# Altium PCB Project.PcbDoc
Units mm, origin at the board's own origin, x right, y up, seen from the top; angles counter-clockwise.
Board outline 150.24 x 92.08 mm, 2 copper layers (Top Layer, Bottom Layer); 38 components, 73 nets, 275 pads, 64 vias.
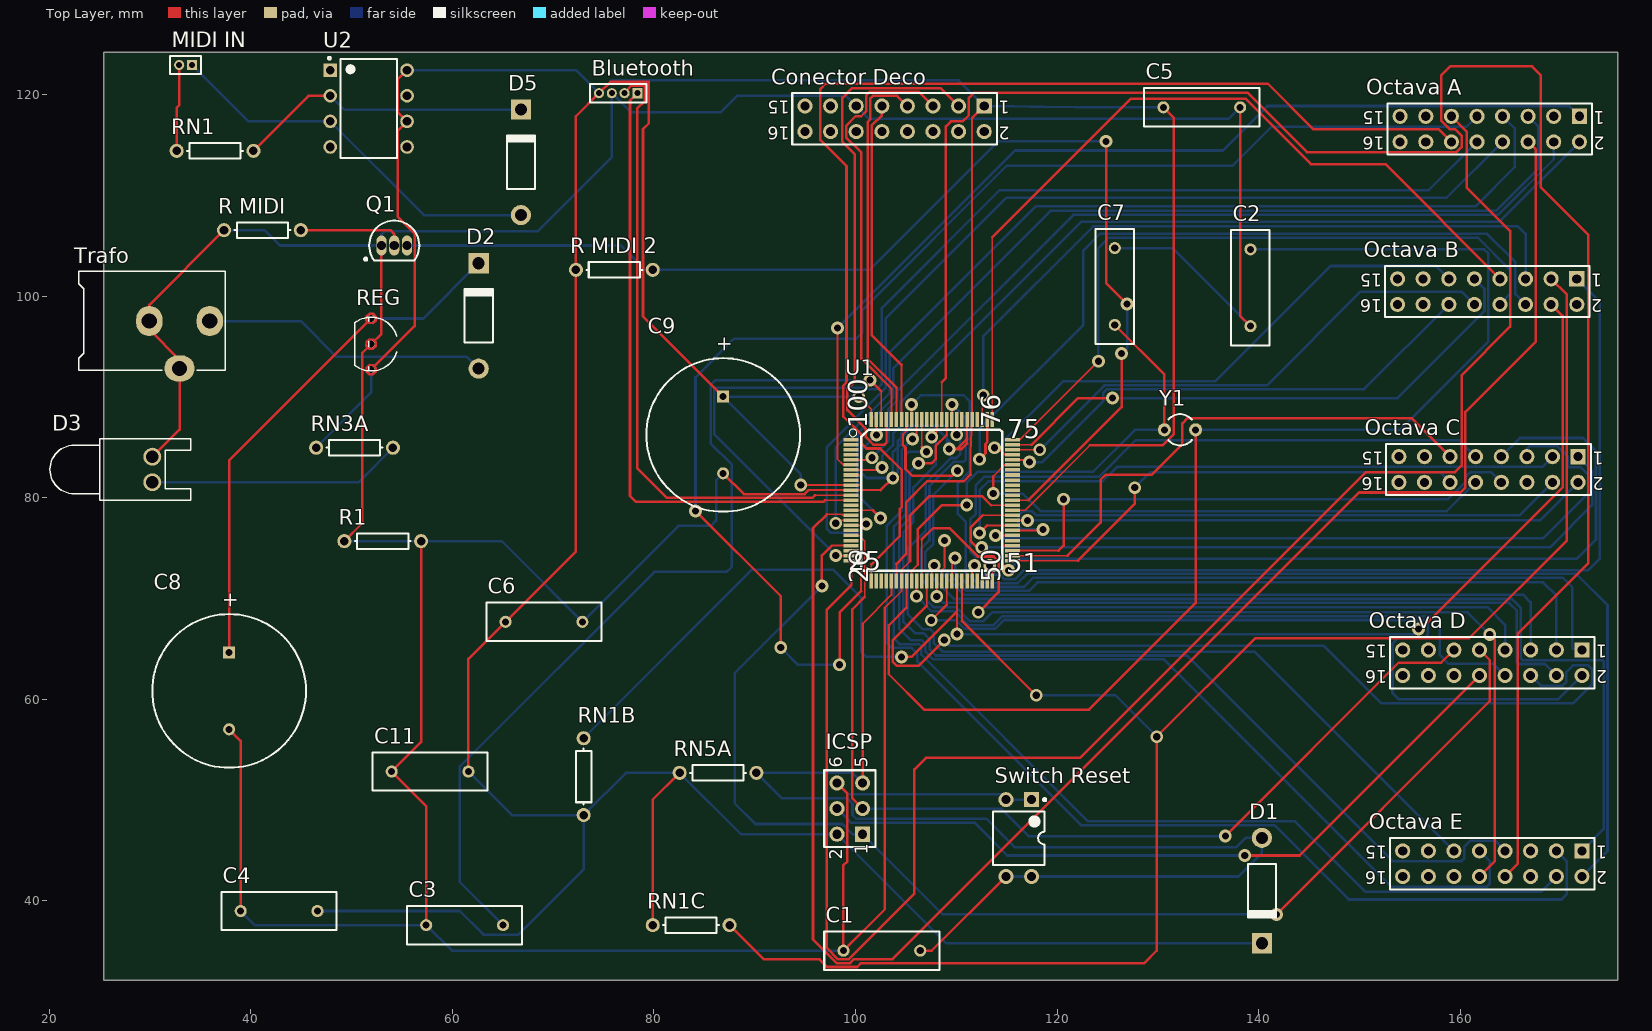
[diagram p0: Top Layer view]
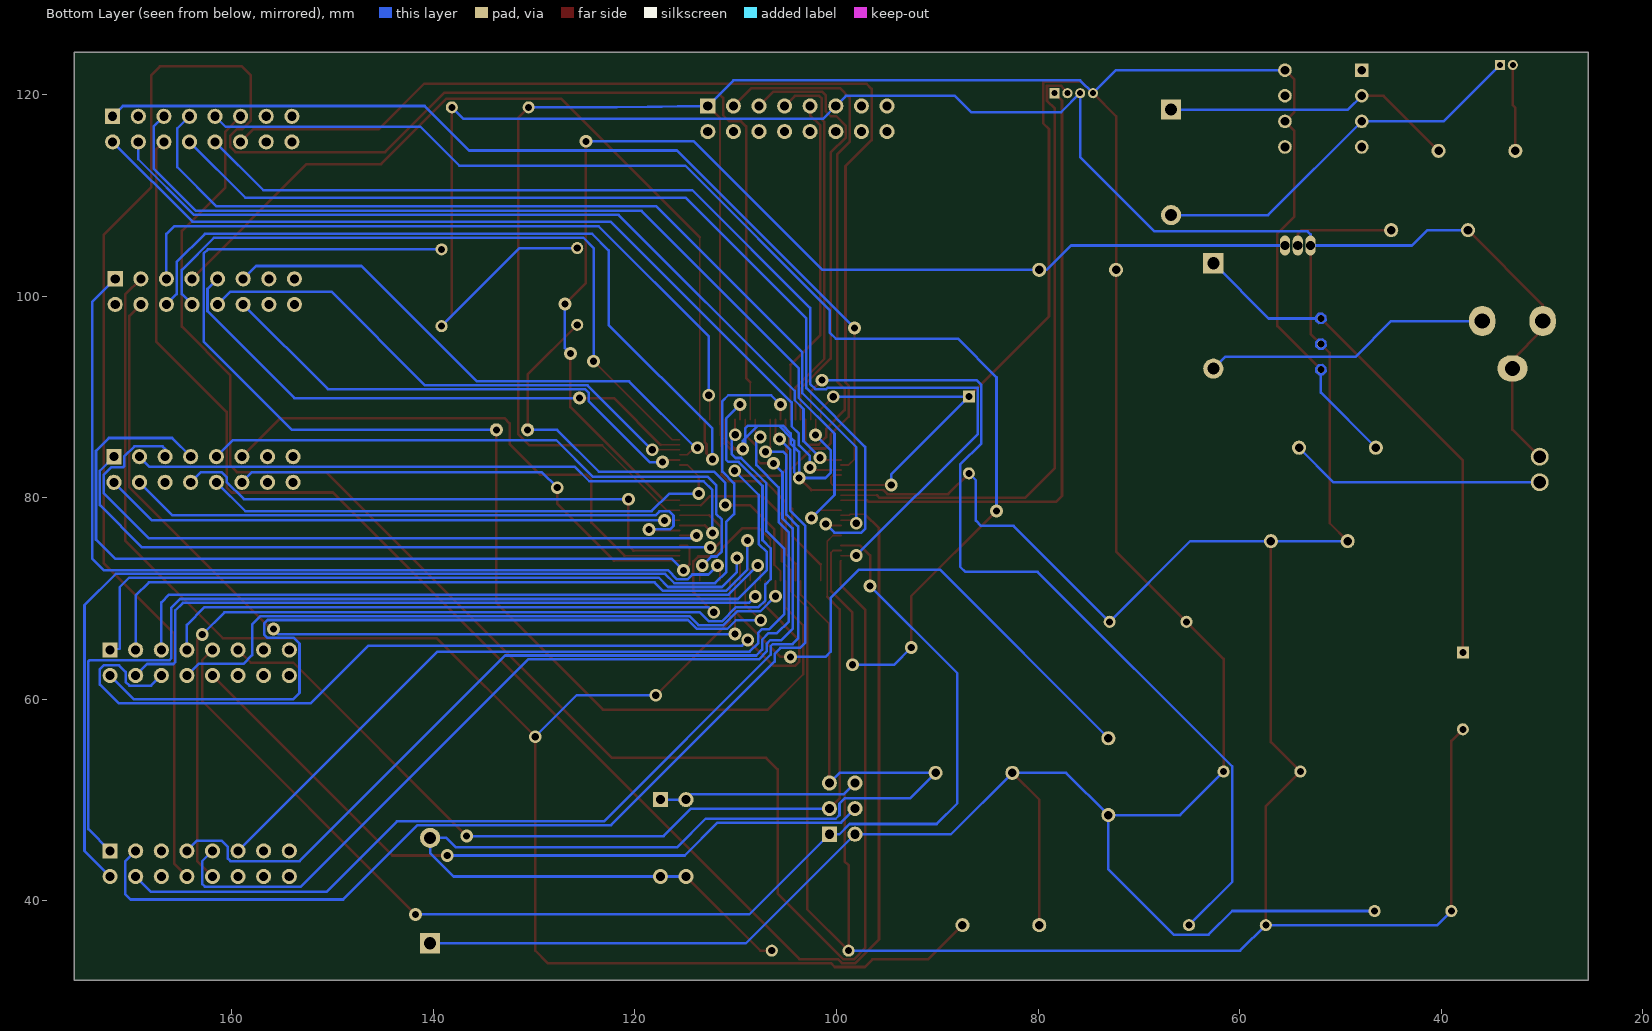
[diagram p1: Bottom Layer view, seen from below]

## Layer stack, top to bottom
Top Solder: solder mask 0.0102, Solder Resist, Dk 3.5
Top Layer: signal copper 0.0356
Dielectric 1: dielectric 0.32, FR-4, Dk 4.8
Bottom Layer: signal copper 0.0356
Bottom Solder: solder mask 0.0102, Solder Resist, Dk 3.5

## Board outline
25.4,32.131 175.641,32.131 175.641,124.206 25.4,124.206

## Design rules (kind name [scope] priority, off if disabled: settings)
Clearance [All] p1: gap=0.127
PolygonConnect [All] p1: connectstyle=Relief reliefconductorwidth=0.254 reliefentries=4 polygonreliefangle="90 Angle" airgapwidth=0.254
RoutingVias [All] p1: holewidth=0.711 width=1.27 viastyle="Through Hole" minholewidth=0.711 minwidth=1.27 maxholewidth=0.711 maxwidth=1.27
SMDNeckDown [All] p1: percent=50.000
SolderMaskExpansion [All] p1: expansion=0.102
Width [All] p1: maxlimit=0.254 minlimit=0.127 preferedwidth=0.254
30 further rules are at their usual default settings.

## Components (designator, comment, footprint, x,y, rotation, side; value= is the part's Value field where it differs from the comment)
Bluetooth "MHDR1X4" MHDR1X4 78.359,120.142 r180 top
C1 "Cap" RAD-0.3 102.616,35.052 r0 top
C2 "Cap" RAD-0.3 139.192,100.838 r270 top
C3 "Cap" RAD-0.3 61.214,37.592 r180 top
C4 "Cap" RAD-0.3 42.799,38.989 r180 top
C5 "Cap" RAD-0.3 134.366,118.745 r0 top
C6 "Cap" RAD-0.3 69.088,67.691 r0 top
C7 "Cap" RAD-0.3 125.73,100.965 r90 top
C8 "Cap Pol1" RB7.6-15 37.846,60.833 r90 top
C9 "Cap Pol1" RB7.6-15 86.868,86.233 r90 top
C11 "Cap" RAD-0.3 57.785,52.832 r0 top
"Conector Deco" "Header 8X2" HDR2X8 112.776,118.872 r180 top
D1 "Diode 1N4001" DO-41 140.335,41.021 r270 top
D2 "Diode 1N4001" DO-41 62.611,98.044 r90 top
D3 "LED_ON" LED-0 30.226,82.804 r270 top
D5 "Diode 1N4148" DO-41 66.802,113.284 r90 top
ICSP "Header 3X2" HDR2X3 100.711,46.609 r90 top
"MIDI IN" "MHDR1X2" MHDR1X2 34.163,122.936 r180 top
"Octava A" "Header 8X2" HDR2X8 171.831,117.856 r180 top
"Octava B" "Header 8X2" HDR2X8 171.577,101.727 r180 top
"Octava C" "Header 8X2" HDR2X8 171.704,84.074 r180 top
"Octava D" "Header 8X2" HDR2X8 172.085,64.897 r180 top
"Octava E" "Header 8X2" HDR2X8 172.085,44.958 r180 top
Q1 "BC547" TO-92A 54.229,105.029 r270 top
R1 "Res1" AXIAL-0.3 53.086,75.692 r180 top
"R MIDI" "Res1" AXIAL-0.3 41.148,106.553 r180 top
"R MIDI 2" "Res1" AXIAL-0.3 76.073,102.616 r0 top
REG "7805" TO92- 51.943,95.25 r270 top
RN1 "Res1" AXIAL-0.3 36.449,114.427 r180 top
RN1B "Res1" AXIAL-0.3 73.025,52.324 r90 top
RN1C "Res1" AXIAL-0.3 83.693,37.592 r0 top
RN3A "Res1" AXIAL-0.3 50.292,84.963 r180 top
RN5A "Res1" AXIAL-0.3 86.36,52.705 r180 top
"Switch Reset" "SW DIP-2" DIP-4 116.205,46.228 r270 top
Trafo "*" CONN_PWR_JACK_2.1x5.5mm 22.225,97.536 r90 top
U1 "MCU-ATMEGA2560-16AU(TQFP100)" TQFP100-0.5-14X14MM 107.569,79.756 r0 top
U2 "6N136" DIP762W50P254L977H451Q8 51.689,118.618 r0 top
Y1 "XTAL" R38 132.207,86.741 r90 top

## Footprints (in the part's own frame and the unit in brackets; to place one, negate y for a bottom-side part, rotate by r counter-clockwise, add the part's x,y. Pads: shape width x height; smd on the part's side, far side on the other; paste and mask are expansions set on the pad)
AXIAL-0.3 [mm] "Axial Device, Thru-Hole; 2 Leads; 0.3 in Pin Spacing"
  round 1.4 hole 0.85: 1(-3.81,0) 2(3.81,0)
  silkscreen extent -2.77,-0.76 2.77,0.76
CONN_PWR_JACK_2.1x5.5mm [mm] "Power Connector, 2.1mm ID, 5.5mm OD"
  oval 3x2.6 hole 1.511: 1(0,-13.7) 2(0,-7.7)
  oval 2.6x3 hole 1.511: 3(-4.7,-10.7)
  silkscreen extent -4.9,-15.23 4.93,-0.7, body extent -4.9,-14.1 4.5,0, height 11
DIP762W50P254L977H451Q8 [mm]
  rect 1.35x1.35 hole 0.85: 1(-3.81,3.81)
  round 1.35 hole 0.85: 2(-3.81,1.27) 3(-3.81,-1.27) 4(-3.81,-3.81) 5(3.81,-3.81) 6(3.81,-1.27) 7(3.81,1.27) 8(3.81,3.81)
  silkscreen extent -4.04,-4.9 2.8,5.14
DIP-4 [mm] "DIP; 4 Leads; Row Spacing 7.62 mm; Pitch 2.54 mm"
  rect 1.5x1.5 hole 0.9: 1(-3.81,1.27)
  round 1.5 hole 0.9: 2(-3.81,-1.27) 3(3.81,-1.27) 4(3.81,1.27)
  silkscreen extent -3.93,-2.55 2.65,2.7, body extent -3.15,-2.5 3.15,2.5, height 5.6
DO-41 [mm] "Diode, Axial; Body 5.2 x 2.7 mm (LxDia. max), Lead Dia. 0.86 mm (max)"
  round 2 hole 1.2: 1(-5.23,0)
  rect 2x2 hole 1.2: 2(5.23,0)
  silkscreen extent -2.65,-1.4 2.75,1.4
HDR2X3 [mm] "Connector; Header; 3x2 Position"
  rect 1.5x1.5 hole 0.9: 1(0,0)
  round 1.5 hole 0.9: 2(0,2.54) 3(2.54,0) 4(2.54,2.54) 5(5.08,0) 6(5.08,2.54)
  silkscreen extent -1.27,-1.27 6.35,3.81
HDR2X8 [mm] "Connector; Header; 8x2 Position"
  rect 1.5x1.5 hole 0.9: 1(0,0)
  round 1.5 hole 0.9: 2(0,2.54) 3(2.54,0) 4(2.54,2.54) 5(5.08,0) 6(5.08,2.54) 7(7.62,0) 8(7.62,2.54) 9(10.16,0) 10(10.16,2.54) 11(12.7,0) 12(12.7,2.54) 13(15.24,0) 14(15.24,2.54) 15(17.78,0) 16(17.78,2.54)
  silkscreen extent -1.27,-1.27 19.05,3.81
LED-0 [mil] "LED; 2 Leads"
  round 70 hole 50: 1(50,0) 2(-50,0)
  silkscreen extent -120,-400 120,150
MHDR1X2 [mm] "Connector; Header; 2 Position"
  rect 1x1 hole 0.6: 1(0,0)
  round 1 hole 0.6: 2(1.27,0)
  silkscreen extent -0.9,-0.9 2.17,0.9
MHDR1X4 [mm] "Connector; Header; 4 Position"
  rect 1x1 hole 0.6: 1(0,0)
  round 1 hole 0.6: 2(1.27,0) 3(2.54,0) 4(3.81,0)
  silkscreen extent -0.9,-0.9 4.71,0.9
R38 [mm] "Crystal, Thru-Hole; 2 Leads; Body 3.1 x 8.2 mm (Dia.xH)"
  round 1.3 hole 0.7: 1(0,1.55) 2(0,-1.55)
  silkscreen extent -1.55,-1.19 1.55,1.17
RAD-0.3 [mm] "Radial Cap, Thru-Hole; 2 Leads; 0.3 in Pin Spacing"
  round 1.2 hole 0.7: 1(-3.81,0) 2(3.81,0)
  silkscreen extent -5.71,-1.91 5.71,1.91
RB7.6-15 [mm] "Polarized Capacitor (Radial); 2 Leads"
  rect 1.2x1.2 hole 0.7: 1(3.81,0)
  round 1.2 hole 0.7: 2(-3.81,0)
  silkscreen extent -7.62,-7.62 7.62,7.62
TO92- [mm]
  round 0.7 hole 0.7: 1(-2.54,0) 2(0,0) 3(2.54,0)
  Top Layer region: 3.108,0.207 2.795,0.547 2.333,0.568 1.993,0.255 1.972,-0.207 2.285,-0.547 2.747,-0.568 3.087,-0.255
  Top Layer region: 0.568,0.207 0.255,0.547 -0.207,0.568 -0.547,0.255 -0.568,-0.207 -0.255,-0.547 0.207,-0.568 0.547,-0.255
  Top Layer region: -1.972,0.207 -2.285,0.547 -2.747,0.568 -3.087,0.255 -3.108,-0.207 -2.795,-0.547 -2.333,-0.568 -1.993,-0.255
  Bottom Layer region: 3.108,0.207 2.795,0.547 2.333,0.568 1.993,0.255 1.972,-0.207 2.285,-0.547 2.747,-0.568 3.087,-0.255
  Bottom Layer region: 0.568,0.207 0.255,0.547 -0.207,0.568 -0.547,0.255 -0.568,-0.207 -0.255,-0.547 0.207,-0.568 0.547,-0.255
  Bottom Layer region: -1.972,0.207 -2.285,0.547 -2.747,0.568 -3.087,0.255 -3.108,-0.207 -2.795,-0.547 -2.333,-0.568 -1.993,-0.255
  Multi-Layer region: 3.108,0.207 2.795,0.547 2.333,0.568 1.993,0.255 1.972,-0.207 2.285,-0.547 2.747,-0.568 3.087,-0.255
  Multi-Layer region: 0.568,0.207 0.255,0.547 -0.207,0.568 -0.547,0.255 -0.568,-0.207 -0.255,-0.547 0.207,-0.568 0.547,-0.255
  Multi-Layer region: -1.972,0.207 -2.285,0.547 -2.747,0.568 -3.087,0.255 -3.108,-0.207 -2.795,-0.547 -2.333,-0.568 -1.993,-0.255
  silkscreen extent -2.66,-1.65 2.66,2.55
TO-92A [mm] "TO, Flat Index; 3 In-Line, Axial Leads; Body Dia. 4.5mm; Leads 0.51 x 0.48 mm (max)"
  oval 2x1 hole 0.9: 1(0,-1.27) 2(0,0) 3(0,1.27)
  silkscreen extent -2.48,-2.95 1.5,2.48, body extent -2.48,-2.5 1.5,2.5, height 6.86
TQFP100-0.5-14X14MM [mm]
  rect 1.5x0.35 smd: 1(-8,6) 2(-8,5.5) 3(-8,5) 4(-8,4.5) 5(-8,4) 6(-8,3.5) 7(-8,3) 8(-8,2.5) 9(-8,2) 10(-8,1.5) 11(-8,1) 12(-8,0.5) 13(-8,0) 14(-8,-0.5) 15(-8,-1) 16(-8,-1.5) 17(-8,-2) 18(-8,-2.5) 19(-8,-3) 20(-8,-3.5) 21(-8,-4) 22(-8,-4.5) 23(-8,-5) 24(-8,-5.5) 25(-8,-6) 51(8,-6) 52(8,-5.5) 53(8,-5) 54(8,-4.5) 55(8,-4) 56(8,-3.5) 57(8,-3) 58(8,-2.5) 59(8,-2) 60(8,-1.5) 61(8,-1) 62(8,-0.5) 63(8,0) 64(8,0.5) 65(8,1) 66(8,1.5) 67(8,2) 68(8,2.5) 69(8,3) 70(8,3.5) 71(8,4) 72(8,4.5) 73(8,5) 74(8,5.5) 75(8,6)
  rect 0.35x1.5 smd: 26(-6,-8) 27(-5.5,-8) 28(-5,-8) 29(-4.5,-8) 30(-4,-8) 31(-3.5,-8) 32(-3,-8) 33(-2.5,-8) 34(-2,-8) 35(-1.5,-8) 36(-1,-8) 37(-0.5,-8) 38(0,-8) 39(0.5,-8) 40(1,-8) 41(1.5,-8) 42(2,-8) 43(2.5,-8) 44(3,-8) 45(3.5,-8) 46(4,-8) 47(4.5,-8) 48(5,-8) 49(5.5,-8) 50(6,-8) 76(6,8) 77(5.5,8) 78(5,8) 79(4.5,8) 80(4,8) 81(3.5,8) 82(3,8) 83(2.5,8) 84(2,8) 85(1.5,8) 86(1,8) 87(0.5,8) 88(0,8) 89(-0.5,8) 90(-1,8) 91(-1.5,8) 92(-2,8) 93(-2.5,8) 94(-3,8) 95(-3.5,8) 96(-4,8) 97(-4.5,8) 98(-5,8) 99(-5.5,8) 100(-6,8)
  silkscreen extent -8.2,-7 7,7.07

## Part data
Bluetooth: "Header, 4-Pin"
C1 C2 C3 C4 C5 C6 C7 C11: "Capacitor"
C8 C9: "Polarized Capacitor (Radial)"
"Conector Deco" "Octava A" "Octava B" "Octava C" "Octava D" "Octava E": "Header, 8-Pin, Dual row"
D1 D2: "1 Amp General Purpose Rectifier"
D3: library part LED0, "Typical INFRARED GaAs LED"
D5: library part "Diode 1N4001", "1 Amp General Purpose Rectifier"
ICSP: "Header, 3-Pin, Dual row"
"MIDI IN": "Header, 2-Pin"
Q1: library part 2N3904, "NPN General Purpose Amplifier"
R1 "R MIDI" "R MIDI 2" RN1 RN1B RN1C RN3A RN5A: "Resistor"
REG: "5V Positive IC TO-220 Voltage Reg IC TO-220 VOLTAGE REG 5V POSITIVE"
"Switch Reset": "DIP Switch, 2 Position, SPST"
Trafo: library part CONN_PWR_JACK_2.1x5.5mm, "Power Connector, THT, 2.1mm ID, 5.5mm OD"
U1: "ATmega Series 16 MHz 256 KB Flash 8 KB SRAM 8-Bit Microcontroller - TQFP-100"
U2: "6N136 Series Single Channel 15 V 5300 Vrms Transistor Optocoupler - DIP-8"
Y1: "Crystal Oscillator"

## Via types
v1: diameter 1.27, hole 0.711, Top Layer to Bottom Layer, 64 vias

## Nets (pads, with @x,y where several pads share a name; then routed paths per layer and width w, separated by ;. In a path a pad name is that pad's centre, name@x,y a point inside that pad or via, vN(x,y) a via of type N, cw(c..) or ccw(c..) an arc to the next point about the centre after c; other vN are vias at no path point)
GND: "Conector Deco.11" "R MIDI.2" "Switch Reset.1" "Switch Reset.2" Bluetooth.3 C1.1 C2.2 C3.2 C4.2 C5.2 C6.2 C7.2 C8.2 C9.2 C11.1 D3.2 ICSP.6 Q1.1 R1.1 R1.2 REG.2 Trafo.2 Trafo.3 U1.11 U1.32 U1.62 U1.81 U1.99 | length 531.2
  Top Layer w0.175: 95.352,80.756 U1.11 102.498,80.756 ; v1@102.069,86.247 U1.99 ; 102.921,69.091 104.569,70.739 U1.32 104.569,72.87 105.41,73.711 ; 111.069,85.369 111.069,85.852 U1.81 ; 113.454,79.256 U1.62
  Top Layer w0.254: D3.2 32.925,86.773 Trafo.3 32.925,93.675 29.925,96.675 Trafo.2 29.925,99.14 37.338,106.553 ; C8.2 38.989,55.88 C4.2 ; R1.2 51.054,77.47 51.054,94.361 REG.2 52.959,96.266 Q1.1 ; R1.1 56.896,55.753 C11.1 57.404,49.403 C3.2 ; C9.2 88.924,80.367 94.963,80.367 95.352,80.756 ; ICSP.6 99.187,50.673 99.187,43.917 98.806,43.536 C1.1 102.921,39.167 102.921,69.091 ; v1@102.069,86.247 v1(102.083,86.233) ; 102.498,80.756 v1(103.708,81.966) ; 105.41,73.711 105.41,78.232 107.345,80.167 112.543,80.167 113.454,79.256 ; v1(109.296,84.836) 110.053,84.836 ; 111.069,85.369 110.536,84.836 110.053,84.836 ; 111.069,85.852 110.053,84.836 ; C5.2 138.176,98.044 C2.2
  Bottom Layer w0.254: 37.338,106.553 41.377,106.553 42.901,105.029 Q1.1 52.959,106.121 53.264,106.426 68.428,106.426 75.819,113.817 Bluetooth.3 77.699,118.262 86.639,118.262 88.265,119.888 99.06,119.888 100.076,118.872 101.346,117.602 137.033,117.602 C5.2 ; C4.2 40.386,37.592 C3.2 59.944,35.052 C1.1 ; R1.2 R1.1 64.897,75.692 C6.2 82.423,77.216 85.674,77.216 86.182,77.724 86.182,81.737 C9.2 ; ICSP.6 99.289,50.571 114.402,50.571 114.935,50.038 117.475,50.038 ; v1(102.083,86.233) 100.584,84.734 100.584,82.469 101.092,81.961 103.632,81.961 v1@103.708,82.038 ; v1(103.708,81.966) v1@103.708,82.038 ; C7.2 131.445,104.775 C2.2 ; v1@103.708,82.038 104.202,82.532 104.202,85.033 ; v1@103.708,82.038 103.708,84.539 104.202,85.033 ; 104.202,85.033 104.564,85.395 104.564,85.998 ; 104.202,85.033 104.202,85.636 104.564,85.998 ; 104.564,85.998 105.713,87.147 ; 104.564,85.998 104.564,86.392 105.32,87.147 105.713,87.147 ; 105.713,87.147 107.798,87.147 ; 107.798,87.147 109.068,85.877 ; 107.798,87.147 108.788,87.147 109.068,86.868 109.068,85.877 ; 109.068,85.877 109.296,85.649 v1(109.296,84.836) 109.068,85.065 109.068,85.877
NetBluetooth_1: Bluetooth.1 U1.13 | length 62.5
  Top Layer w0.175: 96.977,79.756 U1.13
  Top Layer w0.254: Bluetooth.1 77.626,119.409 77.626,80.195 78.232,79.589 96.81,79.589 96.977,79.756
NetBluetooth_2: Bluetooth.2 U1.12 | length 63.2
  Top Layer w0.175: 96.004,80.256 U1.12
  Top Layer w0.254: Bluetooth.2 77.724,120.896 79.113,120.896 79.113,119.388 78.334,118.609 78.334,82.931 81.28,79.985 95.733,79.985 96.004,80.256
NetC1_2: "Switch Reset.3" "Switch Reset.4" C1.2 D1.1 ICSP.5 RN5A.1 U1.30 | length 125.9
  Top Layer w0.175: 100.711,67.5 103.569,70.358 U1.30
  Top Layer w0.254: ICSP.5 100.711,67.5 ; C1.2 107.569,35.052 114.935,42.418
  Bottom Layer w0.254: ICSP.5 99.695,52.705 RN5A.1 92.71,50.165 99.187,50.165 99.707,49.645 99.707,48.514 100.076,48.145 112.993,48.145 115.799,45.339 137.795,45.339 138.707,46.251 D1.1 140.335,44.742 138.011,42.418 117.475,42.418 114.935,42.418
NetC2_1: C2.1 U1.33 Y1.2 | length 128.7
  Top Layer w0.175: 105.069,69.103 U1.33
  Top Layer w0.254: 105.069,69.103 103.302,67.335 103.302,62.484 106.807,58.979 123.19,58.979 133.757,69.546 Y1.2
  Bottom Layer w0.254: Y1.2 154.039,86.741 162.802,95.504 162.802,104.228 162.382,104.648 C2.1
NetC3_1: C3.1 U1.98 | length 92
  Top Layer w0.175: U1.98 102.569,90.547
  Top Layer w0.254: v1(101.448,91.669) 102.569,90.547
  Bottom Layer w0.254: C3.1 60.731,41.885 60.731,53.34 80.035,72.644 87.224,72.644 87.732,73.152 87.732,83.287 85.623,85.395 85.623,91.186 86.106,91.669 v1(101.448,91.669)
NetC7_1: C7.1 U1.34 Y1.1 | length 47.7
  Top Layer w0.175: U1.34 105.569,72.746 106.172,73.349
  Top Layer w0.254: 106.172,73.349 106.172,76.86 108.585,79.273 v1(111.049,79.273) ; C7.1 130.657,92.228 Y1.1
  Bottom Layer w0.254: v1(111.049,79.273) 111.049,81.495 112.155,82.601 123.596,82.601 127.737,86.741 Y1.1
NetC8_1: C8.1 D2.2 REG.1 | length 51.9
  Top Layer w0.254: C8.1 37.846,83.693 REG.1
  Bottom Layer w0.254: REG.1 57.127,97.79 D2.2
"NetConector Deco_3": "Conector Deco.3" U1.97 | length 52.7
  Top Layer w0.175: 103.069,85.471 U1.97
  Top Layer w0.254: 103.069,85.471 102.878,85.28 101.766,85.28 101.039,86.007 101.039,86.836 99.187,88.688 99.187,90.78 99.949,91.542 99.949,114.058 98.691,115.316 98.691,119.671 99.67,120.65 108.458,120.65 110.236,118.872
"NetConector Deco_5": "Conector Deco.5" U1.96 | length 42.5
  Top Layer w0.175: U1.96 103.569,90.817
  Top Layer w0.254: 103.569,90.817 100.584,93.802 100.584,114.249 99.072,115.761 99.072,116.903 100.025,117.856 100.572,117.856 101.08,118.364 101.08,119.952 101.397,120.269 106.299,120.269 107.696,118.872
"NetConector Deco_7": "Conector Deco.7" U1.95 | length 37.4
  Top Layer w0.175: U1.95 104.069,90.928
  Top Layer w0.254: 104.069,90.928 101.219,93.778 101.219,117.301 101.461,117.543 101.461,119.622 101.727,119.888 104.14,119.888 105.156,118.872
"NetConector Deco_9": "Conector Deco.9" U1.94 | length 32.8
  Top Layer w0.175: U1.94 104.569,93.19
  Top Layer w0.254: 102.616,118.872 102.616,117.936 101.6,116.92 101.6,96.159 104.569,93.19
NetD2_1: D2.1 Trafo.1 | length 28.6
  Bottom Layer w0.254: Trafo.1 44.958,97.536 48.514,93.98 61.445,93.98 D2.1
NetD3_1: D3.1 RN3A.1 | length 25.3
  Bottom Layer w0.254: D3.1 50.673,81.534 RN3A.1
NetD5_1: "MIDI IN.1" D5.1 U2.3 | length 38.8
  Bottom Layer w0.254: 34.163,122.936 39.751,117.348 U2.3 57.173,108.054 D5.1
NetD5_2: D5.2 RN1.1 U2.2 | length 29.4
  Top Layer w0.254: RN1.1 45.72,119.888 U2.2
  Bottom Layer w0.254: U2.2 49.253,118.514 D5.2
NetICSP_1: "Octava D.9" ICSP.1 U1.22 | length 125.2
  Top Layer w0.175: 97.66,75.256 U1.22
  Top Layer w0.254: v1(96.672,71.247) 96.672,74.268 97.66,75.256 ; v1(141.783,38.659) 162.941,59.817 162.941,63.881 161.925,64.897
  Bottom Layer w0.254: v1(96.672,71.247) 88.011,62.586 88.011,49.682 90.068,47.625 98.703,47.625 99.719,46.609 ICSP.1 108.661,38.659 v1(141.783,38.659)
NetICSP_3: "Octava D.11" ICSP.3 U1.20 | length 96.5
  Top Layer w0.175: U1.20 100.35,76.256 100.914,75.692 100.914,70.155
  Top Layer w0.254: ICSP.3 99.695,50.165 99.695,68.936 100.914,70.155 ; v1(136.703,46.431) 153.899,63.627 158.115,63.627 159.385,64.897
  Bottom Layer w0.254: ICSP.3 114.452,49.149 117.17,46.431 v1(136.703,46.431)
NetICSP_4: "Octava D.10" ICSP.4 | length 73.1
  Top Layer w0.254: v1(138.633,44.501) 144.069,44.501 161.925,62.357
  Bottom Layer w0.254: ICSP.4 99.556,47.764 111.799,47.764 115.062,44.501 v1(138.633,44.501)
"NetMIDI IN_2": "MIDI IN.2" RN1.2 | length 8.6
  Top Layer w0.254: RN1.2 32.639,118.694 32.893,118.948 32.893,122.936
"NetOctava A_1": "Octava A.1" U1.6 | length 97.8
  Top Layer w0.175: v1(98.222,96.85) 98.222,83.82 98.786,83.256 U1.6
  Bottom Layer w0.254: v1(98.222,96.85) 115.828,114.456 136.452,114.456 140.868,118.872 170.815,118.872 171.831,117.856
"NetOctava A_2": "Octava A.2" U1.7 | length 88.5
  Top Layer w0.175: U1.7 v1@102.387,82.756
  Top Layer w0.254: v1@102.387,82.756 v1(102.641,83.01)
  Bottom Layer w0.254: v1(102.641,83.01) 102.641,84.137 103.736,85.232 103.736,86.372 104.461,87.097 104.461,89.449 122.421,107.41 163.925,107.41 171.831,115.316
"NetOctava A_4": "Octava A.4" U1.5 | length 86.2
  Top Layer w0.175: U1.5 v1@101.409,83.756
  Top Layer w0.254: v1@101.409,83.756 v1(101.625,83.972)
  Bottom Layer w0.254: v1(101.625,83.972) 103.277,85.624 103.277,88.804 104.146,89.673 104.146,90.6 121.623,108.077 163.779,108.077 169.291,113.589 169.291,115.316
"NetOctava A_5": "Octava A.5" U1.15 | length 98.3
  Top Layer w0.175: U1.15 101.736,78.756
  Top Layer w0.254: 101.736,78.756 v1(102.489,78.003)
  Bottom Layer w0.254: v1(102.489,78.003) 100.203,80.289 100.203,86.36 103.765,89.922 103.765,92.869 119.355,108.458 163.547,108.458 167.767,112.678 167.767,116.84 166.751,117.856
"NetOctava A_6": "Octava A.6" U1.16 | length 168
  Top Layer w0.175: 97.155,78.359 98.654,78.359 98.757,78.256 U1.16
  Top Layer w0.254: 97.155,78.359 95.783,76.987 95.783,36.164 98.131,33.817 99.476,33.817 99.873,34.214 103.683,34.214 149.987,80.518 160.02,80.518 160.528,81.026 160.528,88.519 167.513,95.504 167.513,114.554 166.751,115.316
"NetOctava A_7": "Octava A.7" U1.17 | length 96
  Top Layer w0.175: v1(98.044,77.47) 98.33,77.756 U1.17
  Bottom Layer w0.254: v1(98.044,77.47) 98.044,85.031 103.384,90.371 103.384,94.428 117.875,108.919 161.522,108.919 165.42,112.817 165.42,116.647 164.211,117.856
"NetOctava A_8": "Octava A.8" U1.18 | length 97.8
  Top Layer w0.175: U1.18 100.929,77.256 v1(101.067,77.394)
  Bottom Layer w0.254: v1(101.067,77.394) 100.203,76.53 97.536,76.53 97.155,76.911 97.155,85.039 102.997,90.881 102.997,97.79 114.986,109.779 158.674,109.779 164.211,115.316
"NetOctava A_9": "Octava A.9" U1.23 | length 139.5
  Top Layer w0.175: U1.23 100.352,74.756 100.559,74.549 100.559,70.739
  Top Layer w0.254: v1(84.125,78.689) 92.583,70.231 v1(92.583,65.151) ; v1(98.425,63.424) 98.425,68.605 100.559,70.739
  Bottom Layer w0.254: v1(84.125,78.689) 84.125,91.948 87.96,95.783 100.076,95.783 100.66,96.368 100.66,98.603 115.011,112.954 137.439,112.954 141.3,116.815 160.63,116.815 161.671,117.856 ; v1(92.583,65.151) 94.31,63.424 v1(98.425,63.424)
"NetOctava A_10": "Octava A.10" U1.24 | length 113.5
  Top Layer w0.175: v1(98.046,74.256) U1.24
  Bottom Layer w0.254: v1(98.046,74.256) 86.004,86.297 86.004,90.907 100.884,90.907 101.021,90.77 102.108,90.77 102.616,91.278 102.616,98.831 114.3,110.515 156.87,110.515 161.671,115.316
"NetOctava A_11": "Octava A.11" U1.25 | length 169.5
  Top Layer w0.175: U1.25 99.593,73.756 99.593,71.345
  Top Layer w0.254: 99.593,71.345 97.155,68.906 97.155,35.331 98.288,34.198 99.314,34.198 105.842,40.726 105.842,53.035 106.985,54.178 122.301,54.178 150.673,82.55 159.512,82.55 160.147,83.185 160.147,92.151 164.973,96.977 164.973,106.477 160.655,110.795 160.655,116.332 159.131,117.856
"NetOctava A_12": "Octava A.12" U1.26 | length 119.7
  Top Layer w0.175: U1.26 101.569,73.381
  Top Layer w0.254: 101.569,73.381 104.394,76.206 104.394,78.892 104.597,79.096 104.597,82.728 102.438,84.887 101.092,84.887 100.584,85.395 100.584,86.258 98.806,88.036 98.806,91.135 99.111,91.44 99.111,112.903 96.52,115.494 96.52,120.574 97.028,121.082 140.919,121.082 145.415,116.586 157.861,116.586 159.131,115.316
"NetOctava B_1": "Octava B.1" U1.46 | length 93.8
  Top Layer w0.175: U1.46 111.569,73.025 v1(111.823,73.279)
  Bottom Layer w0.254: v1(111.823,73.279) 112.718,72.384 114.3,72.384 114.777,71.907 115.824,71.907 116.738,72.822 172.72,72.822 173.863,73.965 173.863,99.441 171.577,101.727
"NetOctava B_3": "Octava B.3" RN1C.2 U1.44 | length 169.4
  Top Layer w0.175: 110.569,67.764 U1.44
  Top Layer w0.254: RN1C.2 90.907,34.188 96.438,34.188 97.19,33.436 100.176,33.436 100.557,33.817 128.661,33.817 129.896,35.052 v1(129.896,56.286) 139.675,66.065 160.909,66.065 170.561,75.717 170.561,100.203 169.037,101.727 ; 110.569,67.764 v1(117.932,60.401)
  Bottom Layer w0.254: v1(117.932,60.401) 125.781,60.401 v1(129.896,56.286)
"NetOctava B_4": "Octava B.4" RN1B.2 U1.43 | length 142.6
  Top Layer w0.175: v1@110.069,66.486 110.069,68.7 U1.43
  Top Layer w0.254: v1(104.572,64.211) 105.58,64.211 110.069,68.7 ; v1@110.069,66.486 v1(110.084,66.472) ; v1(155.88,66.98) 156.134,66.98 170.18,81.026 170.18,98.044 169.037,99.187
  Bottom Layer w0.254: RN1B.2 89.75,72.859 97.778,72.859 100.584,70.053 100.584,64.719 101.092,64.211 v1(104.572,64.211) ; v1(110.084,66.472) 155.372,66.472 v1(155.88,66.98)
"NetOctava B_5": "Octava B.5" U1.78 | length 71.4
  Top Layer w0.175: U1.78 v1@112.569,90.065
  Top Layer w0.254: v1@112.569,90.065 v1(112.674,90.17)
  Bottom Layer w0.254: v1(112.674,90.17) 112.674,96.012 123.596,106.934 165.735,106.934 166.497,106.172 166.497,101.727
"NetOctava B_6": "Octava B.6" U1.77 | length 78.6
  Top Layer w0.254: v1(112.319,83.82) 112.903,84.404 112.903,85.331 113.069,85.497 U1.77
  Bottom Layer w0.254: v1(112.319,83.82) 112.319,86.868 122.606,97.155 122.606,104.546 124.239,106.18 162.679,106.18 165.481,103.378 165.481,100.203 166.497,99.187
"NetOctava B_7": "Octava B.7" U1.76 | length 81.6
  Top Layer w0.175: U1.76 113.569,105.847
  Top Layer w0.254: 113.569,105.847 127.33,119.609 138.684,119.609 145.186,113.106 152.578,113.106 163.957,101.727
"NetOctava B_8": "Octava B.8" U1.75 | length 69.5
  Top Layer w0.175: U1.75 116.312,85.756 v1(124.104,93.548)
  Bottom Layer w0.254: v1(124.104,93.548) 124.104,104.775 125.128,105.799 161.79,105.799 164.973,102.616 164.973,100.203 163.957,99.187
"NetOctava B_9": "Octava B.9" U1.74 | length 56
  Top Layer w0.175: U1.74 117.45,85.256
  Top Layer w0.254: 117.45,85.256 122.084,89.891 v1(125.501,89.891)
  Bottom Layer w0.254: v1(125.501,89.891) 153.797,89.891 162.421,98.515 162.421,100.723 161.417,101.727
"NetOctava B_10": "Octava B.10" U1.73 | length 52.9
  Top Layer w0.175: U1.73 v1(118.292,84.756)
  Bottom Layer w0.254: v1(118.292,84.756) 124.696,91.161 140.818,91.161 150.114,100.457 160.147,100.457 161.417,99.187
"NetOctava B_11": "Octava B.11" U1.72 | length 55.2
  Top Layer w0.175: v1(113.792,84.963) 114.097,84.963 114.804,84.256 U1.72
  Bottom Layer w0.254: v1(113.792,84.963) 113.995,84.963 120.574,91.542 135.687,91.542 147.142,102.997 157.607,102.997 158.877,101.727
"NetOctava B_12": "Octava B.12" U1.71 | length 50.4
  Top Layer w0.175: U1.71 117.056,83.756 v1(117.272,83.541)
  Bottom Layer w0.254: v1(117.272,83.541) 118.542,83.541 124.601,89.6 124.601,90.424 124.957,90.78 150.47,90.78 158.877,99.187
"NetOctava C_1": "Octava C.1" U1.60 | length 75.1
  Top Layer w0.175: 112.622,78.256 U1.60
  Top Layer w0.254: v1(112.522,75.057) 112.065,75.057 111.43,75.692 111.43,77.064 112.622,78.256
  Bottom Layer w0.254: v1(112.522,75.057) 112.547,75.082 168.91,75.082 173.101,79.273 173.101,82.677 171.704,84.074
"NetOctava C_2": "Octava C.2" U1.59 | length 57.7
  Top Layer w0.175: U1.59 v1(117.069,77.756)
  Bottom Layer w0.254: v1(117.069,77.756) 167.926,77.756 171.704,81.534
"NetOctava C_3": "Octava C.3" U1.58 | length 66
  Top Layer w0.175: 113.07,77.256 U1.58
  Top Layer w0.254: v1(112.319,76.505) 113.07,77.256
  Bottom Layer w0.254: v1(112.319,76.505) 112.319,80.772 113.182,81.636 124.536,81.636 125.971,83.07 168.16,83.07 169.164,84.074
"NetOctava C_4": "Octava C.4" U1.57 | length 61.4
  Top Layer w0.175: U1.57 v1@118.511,76.756
  Top Layer w0.254: v1@118.511,76.756 v1(118.615,76.86)
  Bottom Layer w0.254: v1(118.615,76.86) 116.535,76.86 116.18,77.216 116.18,78.239 116.586,78.645 117.57,78.645 117.958,78.257 165.887,78.257 169.164,81.534
"NetOctava C_5": "Octava C.5" U1.56 | length 73
  Top Layer w0.175: v1(113.894,76.256) U1.56
  Bottom Layer w0.254: v1(113.894,76.256) 114.178,75.971 168.224,75.971 172.72,80.467 172.72,82.271 171.983,83.007 170.815,83.007 170.688,83.134 170.688,84.074 169.672,85.09 166.878,85.09 166.624,84.836 166.624,84.074
"NetOctava C_7": "Octava C.7" U1.54 | length 82.6
  Top Layer w0.175: 114.59,73.395 114.59,75.057 114.789,75.256 U1.54
  Top Layer w0.254: 114.59,73.395 v1(115.189,72.796)
  Bottom Layer w0.254: v1(115.189,72.796) 116.357,73.965 171.596,73.965 173.482,75.851 173.482,84.658 172.212,85.928 165.938,85.928 164.084,84.074
"NetOctava C_8": "Octava C.8" U1.53 | length 55.1
  Top Layer w0.175: U1.53 120.146,74.756
  Top Layer w0.254: 120.146,74.756 120.65,75.26 v1(120.65,79.858)
  Bottom Layer w0.254: v1(120.65,79.858) 158.801,79.858 160.528,81.585 160.528,82.042 161.036,82.55 163.068,82.55 164.084,81.534
"NetOctava C_9": "Octava C.9" U1.50 | length 63.1
  Top Layer w0.175: v1(113.315,73.273) 113.569,73.019 U1.50
  Bottom Layer w0.254: v1(113.315,73.273) 112.42,74.168 111.887,74.168 111.379,74.676 111.379,77.83 111.938,78.389 111.938,81.247 112.758,82.067 124.155,82.067 127.813,85.725 159.893,85.725 161.544,84.074
"NetOctava C_10": "Octava C.10" U1.70 | length 53.9
  Top Layer w0.175: 113.665,82.113 114.808,83.256 U1.70
  Top Layer w0.254: v1(113.665,80.416) 113.665,82.113
  Bottom Layer w0.254: v1(113.665,80.416) 116.586,80.416 118.339,78.664 158.674,78.664 161.544,81.534
"NetOctava C_11": "Octava C.11" U1.52 | length 54.4
  Top Layer w0.175: U1.52 121.043,74.256
  Top Layer w0.254: 121.043,74.256 124.333,77.546 124.333,81.788 124.841,82.296 129.413,82.296 132.436,85.319 132.436,87.376 132.969,87.909 155.169,87.909 159.004,84.074
"NetOctava C_12": "Octava C.12" U1.51 | length 48.4
  Top Layer w0.175: U1.51 122.08,73.756
  Top Layer w0.254: 122.08,73.756 127.711,79.387 v1(127.711,81.001)
  Bottom Layer w0.254: v1(127.711,81.001) 129.261,82.55 157.988,82.55 159.004,81.534
"NetOctava D_1": "Octava D.1" U1.42 | length 73.5
  Top Layer w0.175: U1.42 v1@109.569,73.69
  Top Layer w0.254: v1@109.569,73.69 v1(109.887,74.008)
  Bottom Layer w0.254: v1(109.887,74.008) 109.887,72.621 111.362,71.145 116.713,71.145 117.627,72.06 170.205,72.06 171.145,71.12 171.145,65.024 172.085,64.897
"NetOctava D_2": "Octava D.2" U1.41 | length 84.6
  Top Layer w0.175: 109.069,69.394 U1.41
  Top Layer w0.254: v1(107.518,67.843) 109.069,69.394
  Bottom Layer w0.254: v1(107.518,67.843) 109.982,67.843 110.846,66.98 113.86,66.98 114.749,67.869 156.464,67.869 156.769,67.564 156.769,66.396 156.464,66.091 153.848,66.091 153.289,65.532 153.289,60.63 153.924,59.995 169.723,59.995 172.085,62.357
"NetOctava D_3": "Octava D.3" U1.40 | length 74.8
  Top Layer w0.175: U1.40 108.569,72.806 108.839,73.076 v1(108.839,75.743)
  Bottom Layer w0.254: v1(108.839,75.743) 108.839,72.892 110.967,70.764 117.221,70.764 118.059,71.603 168.224,71.603 169.545,70.282 169.545,64.897
"NetOctava D_4": "Octava D.4" U1.39 | length 69.3
  Top Layer w0.175: v1(108.069,70.199) U1.39
  Bottom Layer w0.254: v1(108.069,70.199) 108.697,69.571 164.871,69.571 165.62,68.822 165.62,63.685 165.804,63.5 168.402,63.5 169.545,62.357
"NetOctava D_5": "Octava D.5" U1.38 | length 67
  Top Layer w0.175: U1.38 107.569,73.025 v1(107.823,73.279)
  Bottom Layer w0.254: v1(107.823,73.279) 110.719,70.383 166.243,70.383 167.005,69.621 167.005,64.897
"NetOctava D_6": "Octava D.6" U1.37 | length 93
  Top Layer w0.175: 107.069,69.24 U1.37
  Top Layer w0.254: 107.069,69.24 103.683,65.854 103.683,63.754 104.115,63.322 106.248,63.322 v1(108.814,65.888)
  Bottom Layer w0.254: v1(108.814,65.888) 109.372,65.329 146.456,65.329 152.171,59.614 171.247,59.614 173.101,61.468 173.101,62.992 172.72,63.373 171.196,63.373 170.549,62.726 170.549,61.722 170.18,61.353 168.009,61.353 167.005,62.357
"NetOctava D_7": "Octava D.7" U1.36 | length 75.2
  Top Layer w0.175: U1.36 106.569,75.84
  Top Layer w0.254: 106.569,75.84 107.716,76.987 109.317,76.987 112.136,74.168 113.716,74.168 114.204,73.68 114.204,70.643 v1(112.192,68.631)
  Bottom Layer w0.254: v1(112.192,68.631) 112.7,69.139 162.721,69.139 164.465,67.395 164.465,64.897
"NetOctava D_8": "Octava D.8" U1.35 | length 65.7
  Top Layer w0.175: v1(106.069,70.232) U1.35
  Bottom Layer w0.254: v1(106.069,70.232) 107.569,68.732 109.855,68.732 111.227,67.361 113.702,67.361 114.591,68.25 157.175,68.25 157.988,67.437 157.988,64.389 158.865,63.512 163.31,63.512 164.465,62.357
"NetOctava E_1": "Octava E.1" U1.93 | length 115.7
  Top Layer w0.175: 104.711,85.231 104.711,86.319 105.069,86.676 U1.93
  Top Layer w0.254: 104.711,85.231 104.965,84.977 104.965,82.868 105.664,82.169 109.601,82.169 v1(110.109,82.677)
  Bottom Layer w0.254: v1(110.109,82.677) 107.728,80.296 107.728,75.427 106.909,74.608 106.909,72.832 109.789,69.952 165.137,69.952 166.001,69.088 166.001,64.072 166.192,63.881 174.117,63.881 174.244,63.754 174.244,47.117 172.085,44.958
"NetOctava E_2": "Octava E.2" U1.92 | length 119.4
  Top Layer w0.175: U1.92 v1(105.569,89.256)
  Bottom Layer w0.254: v1(105.569,89.256) 106.483,90.17 110.744,90.17 111.328,89.586 111.328,82.596 110.154,81.422 110.154,78.389 110.922,77.621 110.922,72.644 112.039,71.526 116.103,71.526 117.018,72.441 171.526,72.441 174.625,69.342 174.625,44.958 172.085,42.418
"NetOctava E_3": "Octava E.3" U1.91 | length 106.8
  Top Layer w0.175: v1@106.069,86.244 U1.91
  Top Layer w0.254: v1(105.651,85.827) v1@106.069,86.244
  Bottom Layer w0.254: v1(105.651,85.827) 104.597,84.773 104.597,78.715 103.124,77.241 103.124,65.608 103.632,65.1 105.56,65.1 106.145,64.516 106.145,63.738 122.369,47.514 141.589,47.514 148.971,40.132 170.053,40.132 170.561,40.64 170.561,43.942 169.545,44.958
"NetOctava E_4": "Octava E.4" U1.90 | length 101.6
  Top Layer w0.175: 106.569,85.049 U1.90
  Top Layer w0.254: 106.569,85.049 v1(107.061,84.557)
  Bottom Layer w0.254: v1(107.061,84.557) 105.283,84.557 104.978,84.252 104.978,78.334 103.81,77.165 103.81,66.04 104.369,65.481 106.324,65.481 106.528,65.278 106.528,64.44 123.072,47.895 143.621,47.895 150.622,40.894 168.021,40.894 169.545,42.418
"NetOctava E_7": "Octava E.7" U1.87 | length 93.8
  Top Layer w0.175: v1(107.569,86.03) 108.069,86.53 U1.87
  Bottom Layer w0.254: v1(107.569,86.03) 107.95,85.649 107.95,83.23 105.74,81.02 105.74,77.572 104.737,76.569 104.737,67.742 105.918,66.561 106.73,66.561 107.384,65.907 107.384,64.929 107.968,64.346 132.885,64.346 153.289,43.942 160.147,43.942 160.401,44.196 160.401,45.339 161.036,45.974 163.449,45.974 164.465,44.958
"NetOctava E_8": "Octava E.8" U1.86 | length 189.3
  Top Layer w0.175: U1.86 108.569,91.475
  Top Layer w0.254: 108.569,91.475 108.966,91.872 108.966,116.84 109.474,117.348 110.642,117.348 111.252,117.958 111.252,119.685 111.76,120.193 138.913,120.193 144.805,114.3 159.639,114.3 160.147,114.808 160.147,115.926 159.487,116.586 158.959,116.586 158.115,117.43 158.115,121.92 159.004,122.809 167.132,122.809 168.021,121.92 168.021,110.795 172.72,106.096 172.72,73.533 165.735,66.548 165.735,43.688 164.465,42.418
"NetOctava E_9": "Octava E.9" U1.85 | length 96.9
  Top Layer w0.175: 109.069,86.252 U1.85
  Top Layer w0.254: v1(106.25,83.414) 107.544,83.414 107.95,83.82 107.95,85.133 109.069,86.252
  Bottom Layer w0.254: v1(106.25,83.414) 105.359,82.523 105.359,77.953 104.356,76.95 104.356,66.98 105.474,65.862 106.578,65.862 106.909,65.532 106.909,64.77 107.714,63.965 130.599,63.965 153.162,41.402 162.687,41.402 162.941,41.656 162.941,43.942 161.925,44.958
"NetOctava E_10": "Octava E.10" U1.84 | length 107
  Top Layer w0.175: U1.84 109.569,89.249 v1(109.576,89.256)
  Top Layer w0.254: 161.925,42.418 163.449,43.942 163.449,65.913 v1(162.941,66.421)
  Bottom Layer w0.254: v1(109.576,89.256) 110.947,87.884 110.947,83.769 110.744,83.566 109.728,83.566 107.347,81.185 107.347,75.792 106.528,74.973 106.528,71.933 107.061,71.399 107.061,69.825 107.772,69.113 110.013,69.113 111.384,67.742 112.674,67.742 113.563,68.631 160.731,68.631 v1(162.941,66.421)
"NetOctava E_11": "Octava E.11" U1.83 | length 86.5
  Top Layer w0.175: v1(110.058,86.258) 110.069,86.269 U1.83
  Bottom Layer w0.254: v1(110.058,86.258) 110.414,85.903 110.414,84.353 110.007,83.947 109.474,83.947 106.966,81.439 106.966,76.697 105.18,74.911 105.18,68.442 106.68,66.942 107.429,66.942 107.765,66.606 107.765,65.598 108.637,64.727 139.616,64.727 159.385,44.958
NetQ1_2: "R MIDI.1" Q1.2 | length 10.6
  Top Layer w0.254: 44.958,106.553 53.848,106.553 54.229,106.172 Q1.2
NetQ1_3: "R MIDI 2.2" Q1.3 U1.63 | length 117.8
  Top Layer w0.175: U1.63 117.166,79.756
  Top Layer w0.254: 117.166,79.756 126.412,89.002 v1(126.412,94.306) ; v1(124.866,115.367) 124.866,101.321 v1(126.949,99.238)
  Bottom Layer w0.254: Q1.3 76.733,105.029 79.146,102.616 79.883,102.616 101.397,102.616 114.148,115.367 v1(124.866,115.367) ; v1(126.412,94.306) 126.949,94.844 v1(126.949,99.238)
VCC: "Conector Deco.1" "R MIDI 2.1" Bluetooth.4 C4.1 C5.1 C6.1 C9.1 C11.2 D1.2 ICSP.2 REG.3 RN1B.1 RN1C.1 RN3A.2 RN5A.2 U1.8 U1.10 U1.31 U1.61 U1.80 U1.100 U2.6 U2.8 | length 515.5
  Top Layer w0.175: v1(94.564,81.256) U1.10 100.355,81.256 100.559,81.459 100.559,82.042 100.345,82.256 U1.8 ; v1(100.33,90.018) 101.569,88.779 U1.100 ; U1.31 104.069,73.448 ; 111.417,82.296 111.417,84.481 U1.80 111.569,117.665 ; U1.61 116.84,78.756 123.276,85.192
  Top Layer w0.254: REG.3 56.261,97.028 56.261,106.223 54.559,107.925 54.559,116.408 U2.6 54.559,118.288 54.559,121.488 U2.8 ; C11.2 61.595,64.008 C6.1 72.263,74.676 72.263,102.616 72.263,117.856 Bluetooth.4 75.684,121.277 79.494,121.277 79.494,117.162 78.918,116.586 78.918,97.993 C9.1 ; RN1C.1 79.883,50.038 RN5A.2 ; 104.069,73.448 105.026,74.405 105.026,79.55 107.112,81.636 110.757,81.636 111.417,82.296 ; 111.569,117.665 112.776,118.872 ; 123.276,85.192 130.48,85.192 131.572,86.284 131.572,117.729 C5.1
  Bottom Layer w0.254: RN3A.2 51.943,90.424 REG.3 ; C4.1 60.731,38.989 63.068,36.652 66.548,36.652 73.025,43.129 RN1B.1 ; U2.8 72.263,122.428 Bluetooth.4 75.819,121.412 110.236,121.412 112.776,118.872 121.793,118.745 C5.1 ; C11.2 65.913,48.514 RN1B.1 ; v1(94.564,81.256) 94.564,82.347 C9.1 100.305,90.043 v1(100.33,90.018) ; D1.2 108.989,35.791 ICSP.2 88.646,46.609 RN5A.2 77.216,52.705 RN1B.1
pads on no net: "Conector Deco.2" "Conector Deco.4" "Conector Deco.6" "Conector Deco.8" "Conector Deco.10" "Conector Deco.12" "Conector Deco.13" "Conector Deco.14" "Conector Deco.15" "Conector Deco.16" "Octava A.3" "Octava A.13" "Octava A.14" "Octava A.15" "Octava A.16" "Octava B.2" "Octava B.13" "Octava B.14" "Octava B.15" "Octava B.16" "Octava C.6" "Octava C.13" "Octava C.14" "Octava C.15" "Octava C.16" "Octava D.12" "Octava D.13" "Octava D.14" "Octava D.15" "Octava D.16" "Octava E.5" "Octava E.6" "Octava E.12" "Octava E.13" "Octava E.14" "Octava E.15" "Octava E.16" U1.1 U1.2 U1.3 U1.4 U1.9 U1.14 U1.19 U1.21 U1.27 U1.28 U1.29 U1.45 U1.47 U1.48 U1.49 U1.55 U1.64 U1.65 U1.66 U1.67 U1.68 U1.69 U1.79 U1.82 U1.88 U1.89 U2.1 U2.4 U2.5 U2.7

## Text inside footprints (layer, text, board x,y; h text height)
C8: Top Overlay "+" at 38.583,68.965 h1.5 r90
C9: Top Overlay "+" at 87.605,94.365 h1.5 r90
"Conector Deco": Top Overlay "16" at 93.472,116.84 h1.27 r180; Top Overlay "15" at 93.472,119.38 h1.27 r180; Top Overlay "1" at 115.316,119.38 h1.27 r180; Top Overlay "2" at 115.316,116.84 h1.27 r180
ICSP: Top Overlay "1" at 101.219,44.577 h1.27 r90; Top Overlay "2" at 98.679,44.069 h1.27 r90; Top Overlay "5" at 101.219,53.213 h1.27 r90; Top Overlay "6" at 98.679,53.213 h1.27 r90
"Octava A": Top Overlay "16" at 152.527,115.824 h1.27 r180; Top Overlay "15" at 152.527,118.364 h1.27 r180; Top Overlay "1" at 174.371,118.364 h1.27 r180; Top Overlay "2" at 174.371,115.824 h1.27 r180
"Octava B": Top Overlay "16" at 152.273,99.695 h1.27 r180; Top Overlay "15" at 152.273,102.235 h1.27 r180; Top Overlay "1" at 174.117,102.235 h1.27 r180; Top Overlay "2" at 174.117,99.695 h1.27 r180
"Octava C": Top Overlay "16" at 152.4,82.042 h1.27 r180; Top Overlay "15" at 152.4,84.582 h1.27 r180; Top Overlay "1" at 174.244,84.582 h1.27 r180; Top Overlay "2" at 174.244,82.042 h1.27 r180
"Octava D": Top Overlay "16" at 152.781,62.865 h1.27 r180; Top Overlay "15" at 152.781,65.405 h1.27 r180; Top Overlay "1" at 174.625,65.405 h1.27 r180; Top Overlay "2" at 174.625,62.865 h1.27 r180
"Octava E": Top Overlay "16" at 152.781,42.926 h1.27 r180; Top Overlay "15" at 152.781,45.466 h1.27 r180; Top Overlay "1" at 174.625,45.466 h1.27 r180; Top Overlay "2" at 174.625,42.926 h1.27 r180
U1: Top Overlay "100" at 101.169,86.906 h1.88 r90; Top Overlay "76" at 114.369,87.006 h1.88 r90; Top Overlay "75" at 115.069,85.906 h1.88; Top Overlay "51" at 114.969,72.606 h1.88; Top Overlay "50" at 114.369,71.606 h1.88 r90; Top Overlay "26" at 101.269,71.506 h1.88 r90; Top Overlay "25" at 99.269,72.806 h1.88; Mechanical 1 "R" at 110.959,78.436 h1.88; Mechanical 1 "TQFP 100" at 104.759,77.026 h1.88